# Altium PCB Copy of BMS_Carrier_Board.PcbDoc (part 2 of 2)
Units mm, origin at the board's own origin, x right, y up, seen from the top; angles counter-clockwise.
Board outline 100 x 40 mm, 2 copper layers (Top Layer, Bottom Layer); 84 components, 80 nets, 335 pads, 18 vias.
Unrouted connection lines stored in the file: 187.
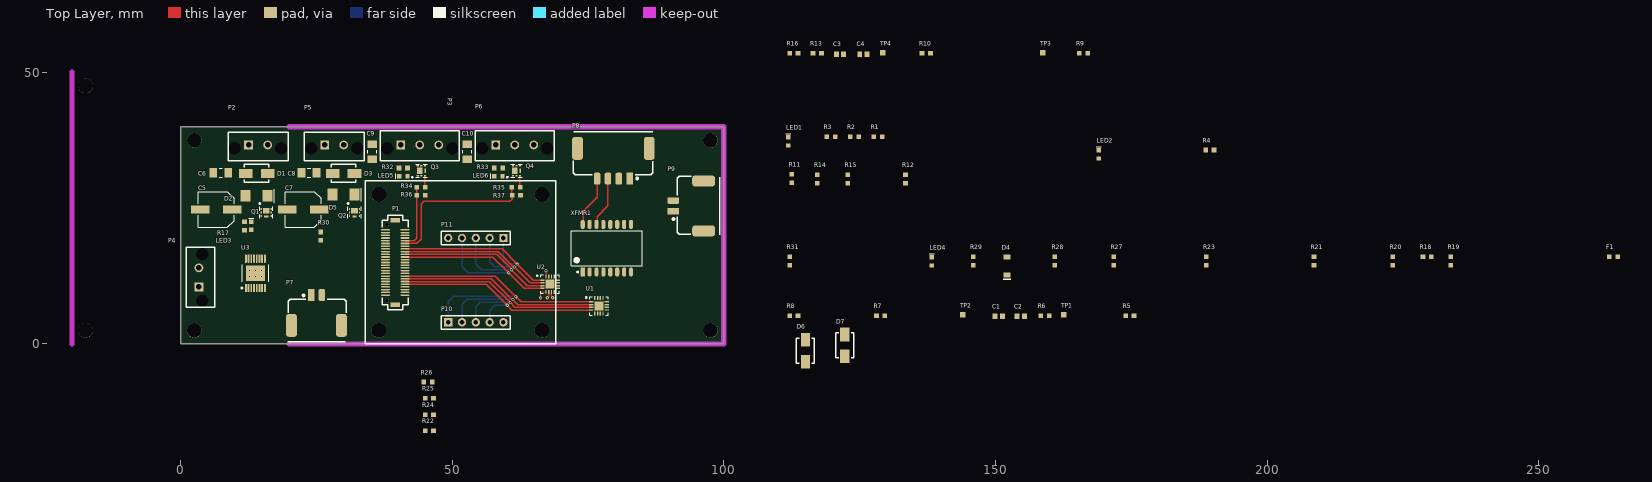
[diagram p0: Top Layer view]

## Via types
v1: diameter 0.6, hole 0.3, Top Layer to Bottom Layer, tented both sides, 12 vias
v2: diameter 0.5, hole 0.2, Top Layer to Bottom Layer, 6 vias

## Nets (pads, with @x,y where several pads share a name; then routed paths per layer and width w, separated by ;. In a path a pad name is that pad's centre, name@x,y a point inside that pad or via, vN(x,y) a via of type N, cw(c..) or ccw(c..) an arc to the next point about the centre after c; other vN are vias at no path point) (continued)
PB14/SPI2_MISO: (continued)
  Bottom Layer w0.254: P11.2 56.87,15.13 57.781,14.219 61.374,14.219 v1(61.421,14.171)
PB15/SPI2_MOSI: P1.8 P11.1 U2.1 | length 34.6
  Top Layer w0.254: P1.8 59.157,17.5 v1(61.953,14.703) 64.907,11.75 U2.1
  Bottom Layer w0.254: P11.1 59.41,15.297 59.956,14.751 61.906,14.751 v1(61.953,14.703)
PC13: P1.30
PHA: R12.2 R15.1 U2.7 | length 1.2
  Top Layer w0.254: U2.7 68.25,8.75 v1(68.5,8.5)
POL: R11.2 R14.1 U2.6 | length 1.2
  Top Layer w0.254: v1(67.5,8.5) 67.75,8.75 U2.6
pads on no net: P1. P1.12 P1.35 P1.46 P2. P3. P4. P5. P6. P7.3 P8.7 P9.3 U3.8 U3.9 U3.10 U3.11 U3.12 XFMR1.4 XFMR1.5 XFMR1.10 XFMR1.12 XFMR1.13 XFMR1.15

## Keep-outs
Keep-Out Layer:
  lines w1: -20,0 -20,50 ; 20,0 100,0 100,40 20,40

## Silkscreen, mask and mechanical layers (free items; w line width, h text height)
Top Overlay:
  lines w0.254: 34,0 69,0 69,30 34,30 34,0